# EAGLE board PCB (EAGLE 9.7.0)
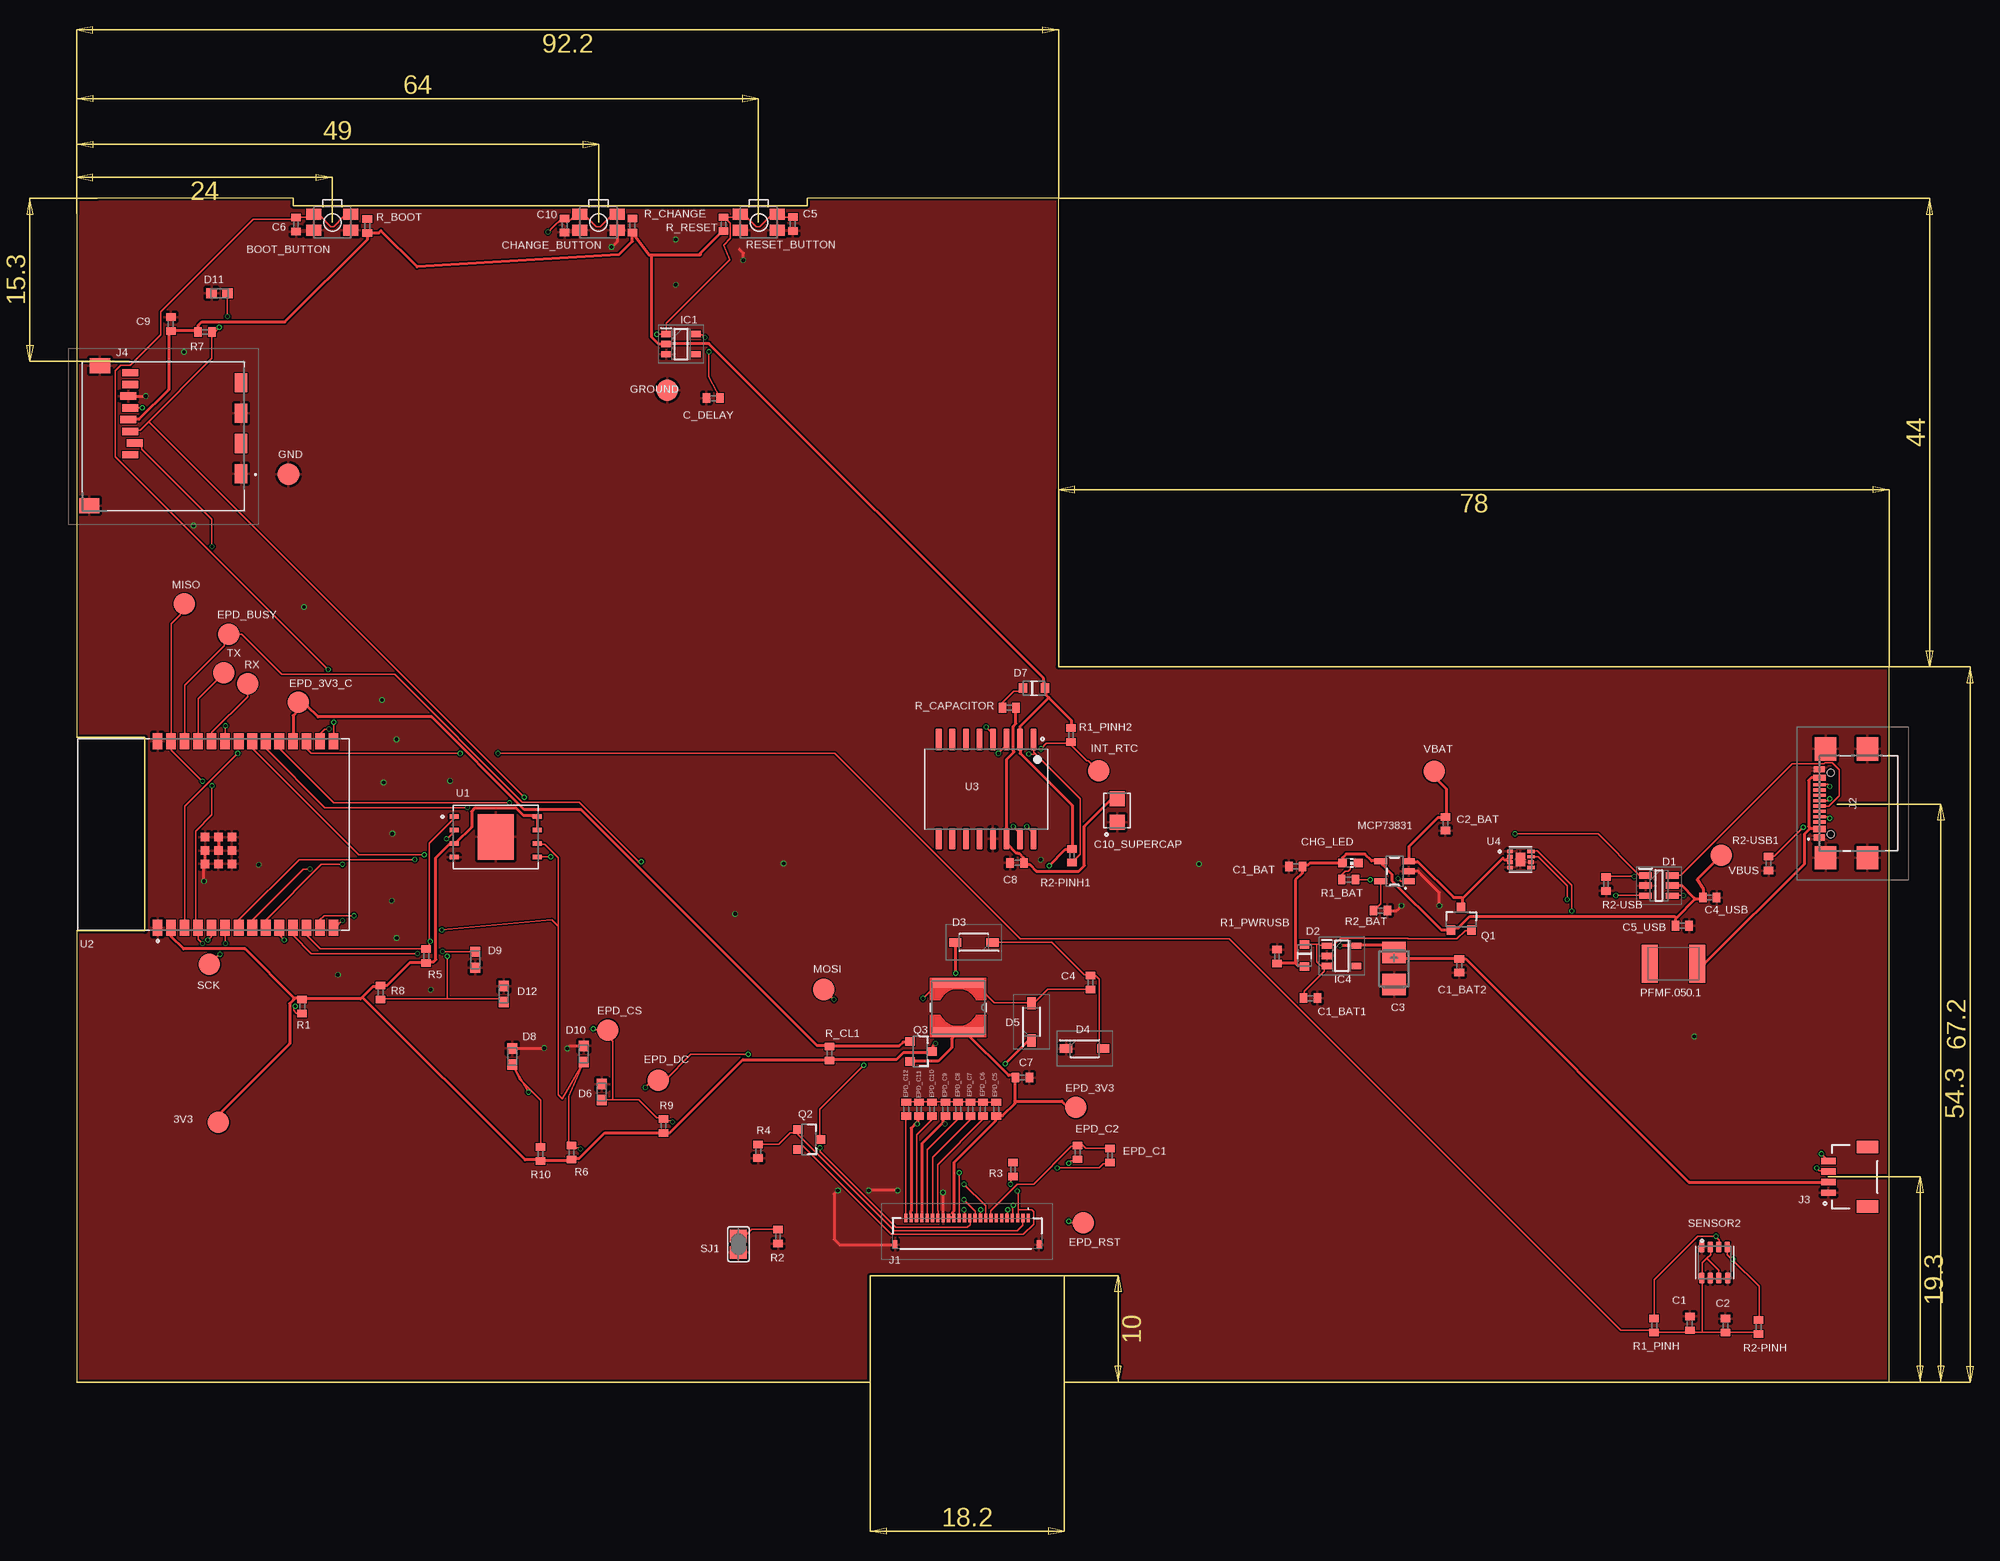
[diagram p0: board, top side]
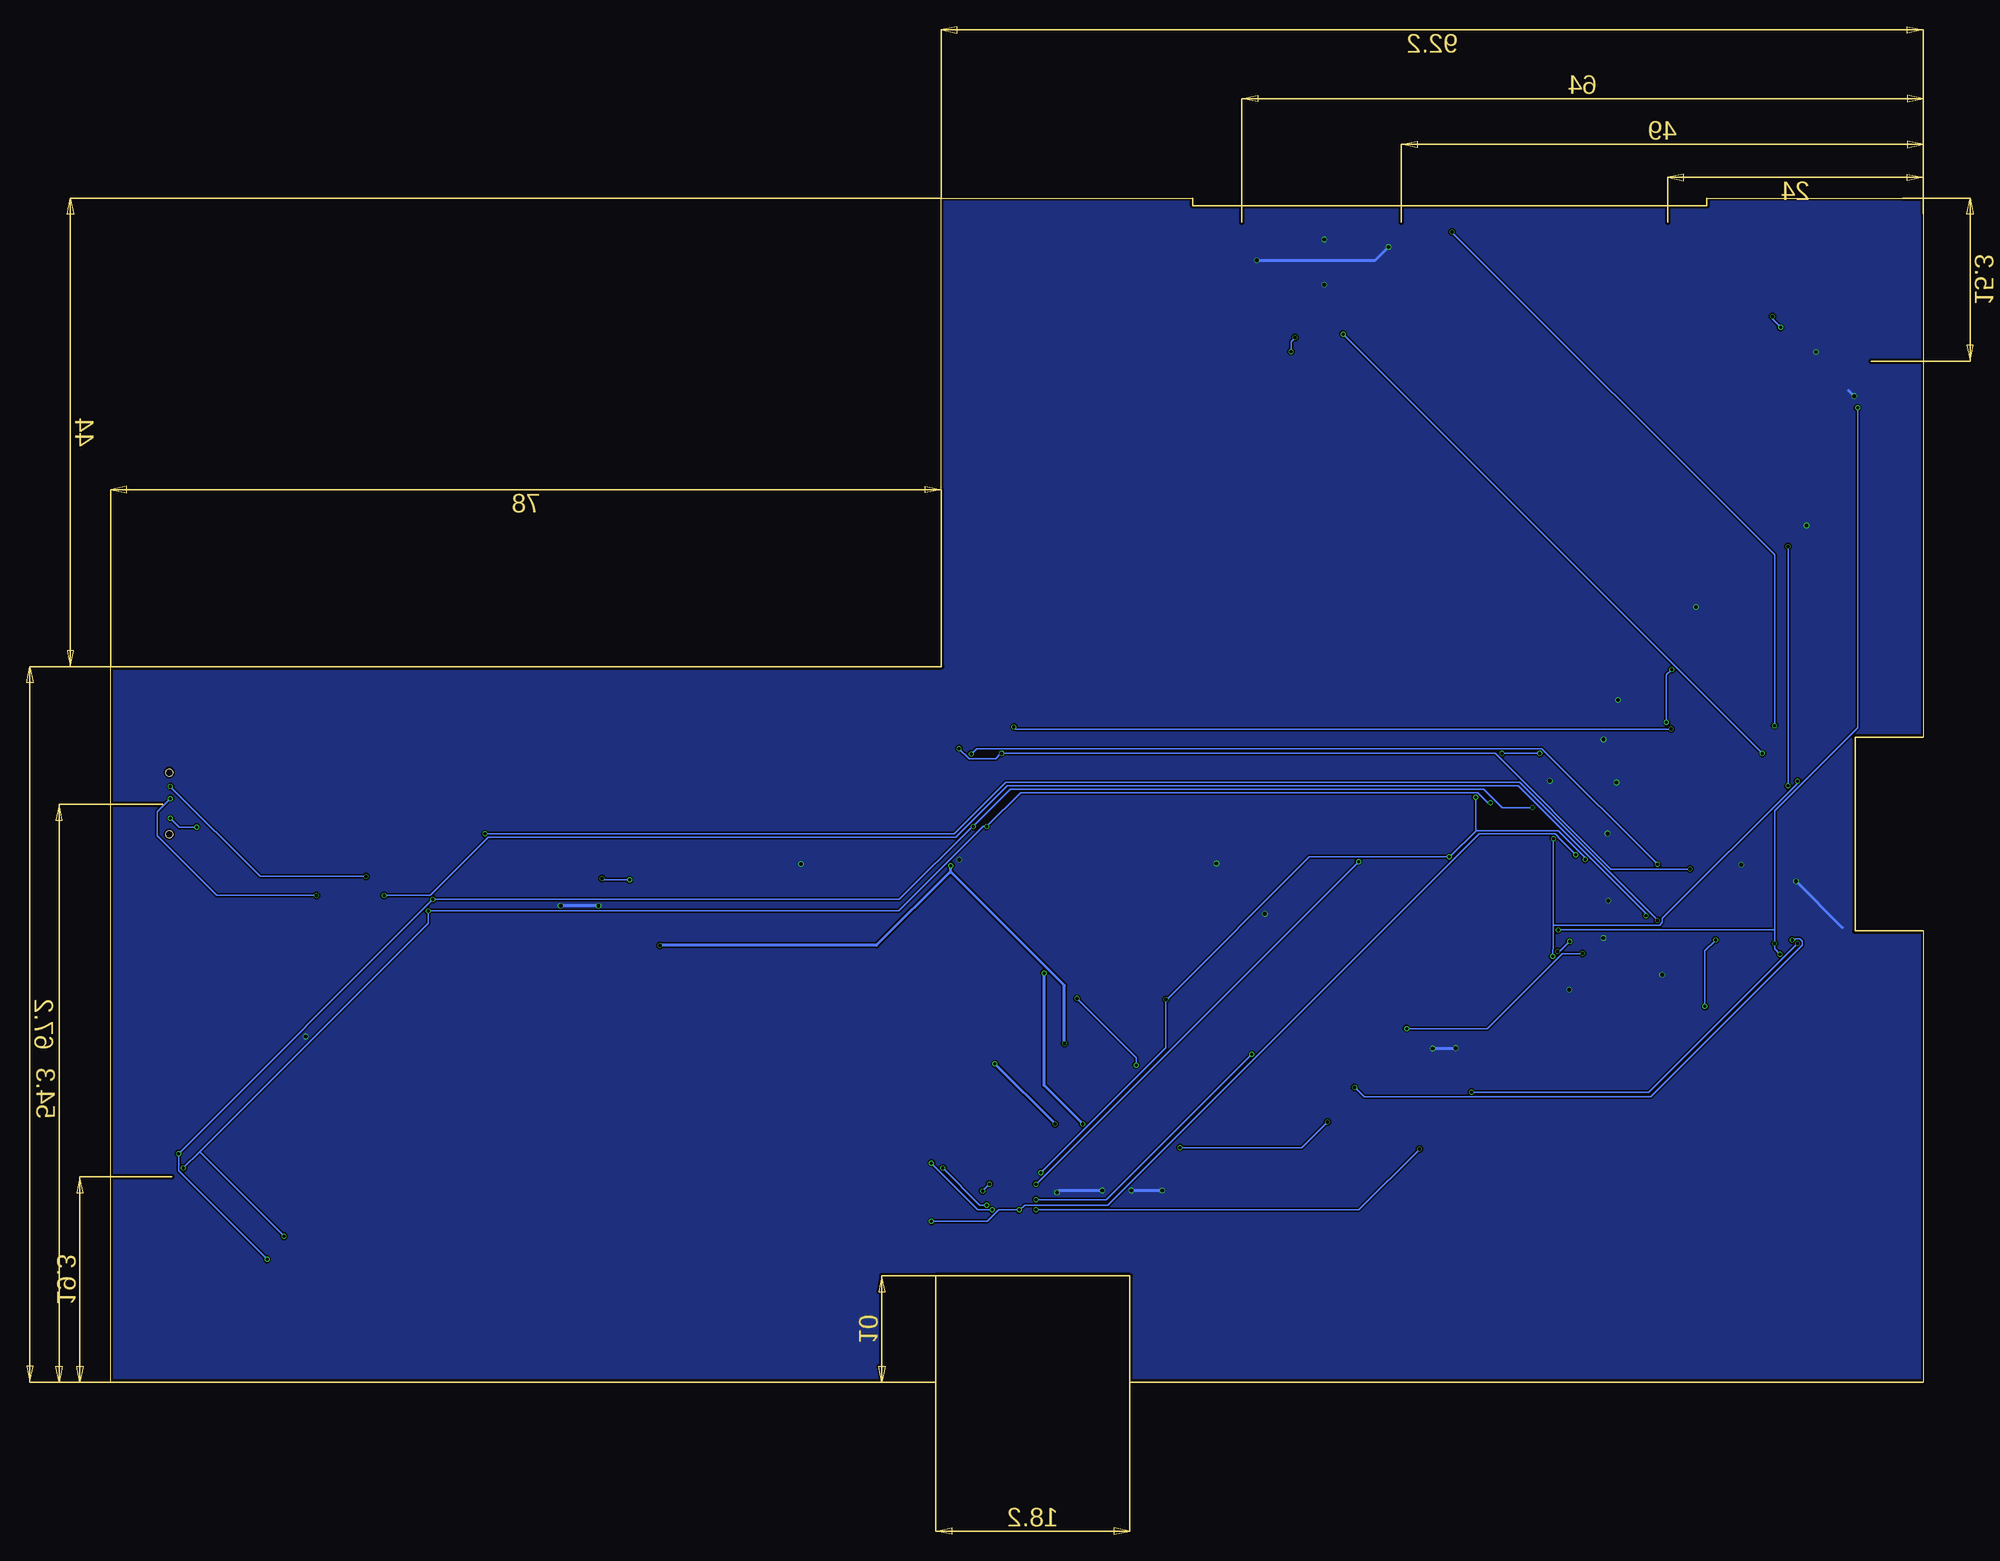
[diagram p1: board, bottom side, seen from below]

Size 170.2 x 111.2 mm. Coordinates in mm from the lower left corner, seen from the top.
Outline: 170.2,0 170.2,67.2 92.2,67.2 92.2,111.2 68.58,111.2 68.58,110.49 20.34,110.49 20.34,111.2 0,111.2 0,60.55 6.4,60.55 6.4,42.4 0,42.4 0,0 74.51,0 74.51,10 92.71,10 92.71,0 170.2,0
Copper layers (1*16): Top 0.035mm / dielectric 1.6mm / Bottom 0.035mm
Design rules "jlcpcb-2layers.dru *": minimum track width 5mil, minimum drill 0.3mm, track to track 5mil, track to pad 5mil, pad to pad 5mil, via to via 5mil, smd to smd 5mil, copper to edge 0.2mm, drill to drill 6mil, minimum pad ring 10mil, minimum via ring 3mil, stop-mask expansion 4mil, vias tented up to drill 0mil, thermal gap 10mil
Net classes: 1 Power: width 0.3 mm; 2 Signal: width 0.15 mm

## Footprints (pad centres in the part's own frame; a part is rotated, then mirrored left to right if it is on the bottom)
TP20R = smd 2 x 2: TP 0,0
MYBUTTON = smd 1.4 x 1.05: 1 1.75,0.75; 2 -1.75,0.75; 3 -1.75,-0.75; 4 1.75,-0.75
EAGLE-LTSPICE_C0402 = smd 0.7 x 0.9: 1 -0.65,0; 2 0.65,0
RCL_CT3528 = smd 2 x 2.2: + -1.5,0; - 1.5,0
CAPCP3225X100N = smd 1.4 x 1.4: 1 -1.1,0; 2 1.1,0
ADAFRUIT_CHIP-LED0603 = smd 0.8 x 0.8: A 0,-0.75; C 0,0.75
SOT95P280X145-6N = smd 1.2 x 0.6: 1 -1.25,0.95; 2 -1.25,0; 3 -1.25,-0.95; 4 1.25,-0.95; 5 1.25,0; 6 1.25,0.95
ESP32_WROVER_AVX---SD0805S020S1R0_AVX_SD0805S020S1R0_0 = smd 0.8 x 0.9: 1 -1.05,0; 2 1.05,0
SOD3716X135N = smd 1.15 x 0.8: 1 -1.75,0; 2 1.75,0
DIOC1608X36N = smd 0.97 x 0.94: 1 -0.75,0; 2 0.75,0
SOT95P280X125-5N = smd 0.9 x 0.6: 1 -1.4,0.95; 2 -1.4,0; 3 -1.4,-0.95; 4 1.4,-0.95; 5 1.4,0.95
SOT95P280X120-5N = smd 0.9 x 0.6: 1 -1.4,0.95; 2 -1.4,0; 3 -1.4,-0.95; 4 1.4,-0.95; 5 1.4,0.95
FH34SRJ24S05SH99 = smd 0.3 x 0.8: 1 5.75,1.45; 2 5.25,1.45; 3 4.75,1.45; 4 4.25,1.45; 5 3.75,1.45; 6 3.25,1.45; 7 2.75,1.45; 8 2.25,1.45; 9 1.75,1.45; 10 1.25,1.45; 11 0.75,1.45; 12 0.25,1.45; 13 -0.25,1.45; 14 -0.75,1.45; 15 -1.25,1.45; 16 -1.75,1.45; 17 -2.25,1.45; 18 -2.75,1.45; 19 -3.25,1.45; 20 -3.75,1.45; 21 -4.25,1.45; 22 -4.75,1.45; 23 -5.25,1.45; 24 -5.75,1.45 | smd 0.4 x 0.8: MP1 6.75,-1.05; MP2 -6.75,-1.05
SAMACSYS_PARTS_USB4110GFA = smd 0.3 x 1.023: A1 -3.35,3.678; B12 -3.05,3.678 | smd 0.3 x 1.15: A4 -2.55,3.678; A5 -1.25,3.678; A6 -0.25,3.678; A7 0.25,3.678; A8 1.25,3.678; A9 2.55,3.678; B4 2.25,3.678; B5 1.75,3.678; B6 0.75,3.678; B7 -0.75,3.678; B8 -1.75,3.678; B9 -2.25,3.678 | smd 0.3 x 1.048: A12 3.35,3.678; B1 3.05,3.678 | smd 2.18 x 2: MP1 -5.11,-0.827; MP2 5.11,-0.827; MP3 -5.11,3.103; MP4 5.11,3.103 | hole 0.65: -2.89,2.603; 2.89,2.603
JST04_1MM_RA = smd 0.6 x 1.35: 1 -1.5,0; 2 -0.5,0; 3 0.5,0; 4 1.5,0 | smd 1.2 x 2: NC1 2.8,-3.675; NC2 -2.8,-3.675
112ATAARR03ATTEND = smd 1.8 x 1.2: G1 10.6,10.4; G2 4.9,10.4; S1 7.75,10.4; S2 2.05,10.4 | smd 1.4 x 1.9: G3 13.6,-3.85; G4 0.45,-2.85 | smd 0.7 x 1.5: P1 8.8,0; P2 7.7,0.4; P3 6.6,0; P4 5.5,-0.2; P5 4.4,0; P6 3.3,-0.2; P7 2.2,0; P8 1.1,0
IND_4828-WE-TPC_WRE = smd 0.889 x 4.826: 1 -2.286,0; 2 2.286,0
ESP32_WROVER_SPARKFUN-IC-POWER_SOT23-5 = smd 0.55 x 1.2: 1 -0.95,-1.3; 2 0,-1.3; 3 0.95,-1.3; 4 0.95,1.3; 5 -0.95,1.3
ESP32C6_VARISTOR_CT/CN1812 = smd 1.5 x 3.6: 1 -2.25,0; 2 2.25,0
ESP32_WROVER_SPARKFUN-DISCRETESEMI_SOT23-3 = smd 0.8 x 0.9: 1 -0.95,-1; 2 0.95,-1; 3 0,1.1
ESP32_WROVER_EAGLE-LTSPICE_R0402 = smd 0.7 x 0.9: 1 -0.65,0; 2 0.65,0
ESP32_WROVER_BME680_PSON80P300X300X100-8N = smd 1.016 x 0.5: 1 1.458,1.2; 2 1.458,0.4; 3 1.458,-0.4; 4 1.458,-1.2; 5 -1.458,-1.22; 6 -1.458,-0.4; 7 -1.458,0.4; 8 -1.458,1.2
SJ = smd 1.168 x 1.6: 1 -0.762,0; 2 0.762,0
SON127P600X800X80-9N = smd 0.94 x 0.44: 1 -3.895,1.905; 2 -3.895,0.635; 3 -3.895,-0.635; 4 -3.895,-1.905; 5 3.895,-1.905; 6 3.895,-0.635; 7 3.895,0.635; 8 3.895,1.905 | smd 3.4 x 4.3: 9 0,0
XCVR_ESP32-C6-WROOM-1-N8 = smd 1.5 x 0.9: 1 -8.75,5.26; 2 -8.75,3.99; 3 -8.75,2.72; 4 -8.75,1.45; 5 -8.75,0.18; 6 -8.75,-1.09; 7 -8.75,-2.36; 8 -8.75,-3.63; 9 -8.75,-4.9; 10 -8.75,-6.17; 11 -8.75,-7.44; 12 -8.75,-8.71; 13 -8.75,-9.98; 14 -8.75,-11.25; 15 8.75,-11.25; 16 8.75,-9.98; 17 8.75,-8.71; 18 8.75,-7.44; 19 8.75,-6.17; 20 8.75,-4.9; 21 8.75,-3.63; 22 8.75,-2.36; 23 8.75,-1.09; 24 8.75,0.18; 25 8.75,1.45; 26 8.75,2.72; 27 8.75,3.99; 28 8.75,5.26 | smd 0.8 x 0.8: 29_1 -2.755,0.79; 29_2 -1.505,0.79; 29_3 -0.255,0.79; 29_4 -2.755,-0.46; 29_5 -1.505,-0.46; 29_6 -0.255,-0.46; 29_7 -2.755,-1.71; 29_8 -1.505,-1.71; 29_9 -0.255,-1.71
SOIC127P1032X265-16N = smd 2.05 x 0.59: 1 -4.655,4.445; 2 -4.655,3.175; 3 -4.655,1.905; 4 -4.655,0.635; 5 -4.655,-0.635; 6 -4.655,-1.905; 7 -4.655,-3.175; 8 -4.655,-4.445; 9 4.655,-4.445; 10 4.655,-3.175; 11 4.655,-1.905; 12 4.655,-0.635; 13 4.655,0.635; 14 4.655,1.905; 15 4.655,3.175; 16 4.655,4.445
SON50P200X200X80-9N = smd 0.6 x 0.35: 1 -0.985,0.75; 2 -0.985,0.25; 3 -0.985,-0.25; 4 -0.985,-0.75; 6 0.985,-0.25 | smd 0.76 x 0.27: 5 0.985,-0.75; 7 0.985,0.25; 8 0.985,0.75 | smd 0.9 x 1.3: 9 0,0

## Placement (x,y rotation side)
3V3  TPTP20R  [TP20R]  13.31,24.41 0 top
BOOT_BUTTON  BUTTON_CUSYOMV1  [MYBUTTON]  24,108.93 180 top
C1  100nF  [EAGLE-LTSPICE_C0402]  151.48,5.54 90 top
C1_BAT  4.7uF  [EAGLE-LTSPICE_C0402]  114.47,48.45 180 top
C1_BAT1  4.7uF  [EAGLE-LTSPICE_C0402]  115.85,36.07 0 top
C1_BAT2  4.7uF  [EAGLE-LTSPICE_C0402]  129.82,39.12 270 top
C2  100nF  [EAGLE-LTSPICE_C0402]  154.82,5.34 90 top
C2_BAT  4.7uF  [EAGLE-LTSPICE_C0402]  128.53,52.45 270 top
C3  100uF TANT  [RCL_CT3528]  123.71,38.85 270 top
C4  4.7uF/25V  [EAGLE-LTSPICE_C0402]  95.2,37.54 270 top
C4_USB  100nF  [EAGLE-LTSPICE_C0402]  153.35,45.52 0 top
C5  1uF  [EAGLE-LTSPICE_C0402]  67.25,108.78 270 top
C5_USB  4.7uF  [EAGLE-LTSPICE_C0402]  150.76,42.87 0 top
C6  100nF  [EAGLE-LTSPICE_C0402]  20.6,108.71 270 top
C7  10uF  [EAGLE-LTSPICE_C0402]  88.81,28.62 0 top
C8  100nF  [EAGLE-LTSPICE_C0402]  88.31,48.78 180 top
C9  100nF  [EAGLE-LTSPICE_C0402]  8.84,99.38 90 top
C10  100nF  [EAGLE-LTSPICE_C0402]  45.82,108.62 270 top
C10_SUPERCAP  CPH3225A  [CAPCP3225X100N]  97.69,53.7 90 top
C_DELAY  100nF  [EAGLE-LTSPICE_C0402]  59.77,92.42 180 top
CHANGE_BUTTON  BUTTON_CUSYOMV1  [MYBUTTON]  49,108.93 180 top
CHG_LED  [ADAFRUIT_CHIP-LED0603]  119.59,48.75 270 top
D1  USBLC6-2SC6Y  [SOT95P280X145-6N]  148.57,46.64 0 top
D2  ESP32_WROVER_AVX---SD0805S020S1R0_AVX_SD0805S020S1R0_0_0AVX_SD0805S020S1R0_0_0  [ESP32_WROVER_AVX---SD0805S020S1R0_AVX_SD0805S020S1R0_0]  115.29,40.08 270 top
D3  MBR0530  [SOD3716X135N]  84.24,41.32 180 top
D4  MBR0530  [SOD3716X135N]  94.65,31.34 0 top
D5  MBR0530  [SOD3716X135N]  89.67,33.84 90 top
D6  PGB1010603MR  [DIOC1608X36N]  49.31,27.25 270 top
D7  ESP32_WROVER_AVX---SD0805S020S1R0_AVX_SD0805S020S1R0_0_0AVX_SD0805S020S1R0_0_0  [ESP32_WROVER_AVX---SD0805S020S1R0_AVX_SD0805S020S1R0_0]  89.89,65.18 0 top
D8  PGB1010603MR  [DIOC1608X36N]  40.91,30.6 270 top
D9  PGB1010603MR  [DIOC1608X36N]  37.41,39.69 90 top
D10  PGB1010603MR  [DIOC1608X36N]  47.6,30.84 270 top
D11  PGB1010603MR  [DIOC1608X36N]  13.42,102.25 0.4 top
D12  PGB1010603MR  [DIOC1608X36N]  40.11,36.46 270 top
EPD_3V3  TPTP20R  [TP20R]  93.82,25.82 0 top
EPD_3V3_C  TPTP20R  [TP20R]  20.81,63.86 0 top
EPD_BUSY  TPTP20R  [TP20R]  14.27,70.24 0 top
EPD_C1  1uF/50V  [EAGLE-LTSPICE_C0402]  97.03,21.3 270 top
EPD_C2  1uF/50V  [EAGLE-LTSPICE_C0402]  93.99,21.59 270 top
EPD_C5  0.1uF/50V  [EAGLE-LTSPICE_C0402]  86.34,25.65 270 top
EPD_C6  1uF/50V  [EAGLE-LTSPICE_C0402]  85.09,25.65 270 top
EPD_C7  1uF/50V  [EAGLE-LTSPICE_C0402]  83.93,25.65 270 top
EPD_C8  1uF/50V  [EAGLE-LTSPICE_C0402]  82.77,25.65 270 top
EPD_C9  1uF/50V  [EAGLE-LTSPICE_C0402]  81.57,25.65 270 top
EPD_C10  1uF/50V  [EAGLE-LTSPICE_C0402]  80.31,25.65 270 top
EPD_C11  1uF/50V  [EAGLE-LTSPICE_C0402]  79.1,25.65 270 top
EPD_C12  1uF/50V  [EAGLE-LTSPICE_C0402]  77.89,25.65 270 top
EPD_CS  TPTP20R  [TP20R]  49.89,33.07 0 top
EPD_DC  TPTP20R  [TP20R]  54.61,28.36 0 top
EPD_RST  TPTP20R  [TP20R]  94.53,14.96 0 top
GND  TPTP20R  [TP20R]  19.89,85.26 0 top
GROUND  TPTP20R  [TP20R]  55.44,93.17 0 top
IC1  BD5229G-TR  [SOT95P280X125-5N]  56.74,97.49 0 top
IC4  XC6220A331MR-G  [SOT95P280X120-5N]  118.78,40.04 0 top
INT_RTC  TPTP20R  [TP20R]  95.96,57.41 0 top
J1  FH34SRJ-24S-0.5SH_99_  [FH34SRJ24S05SH99]  83.61,13.97 0 top
J2  SAMACSYS_PARTS_USB4110-GF-A  [SAMACSYS_PARTS_USB4110GFA]  167.32,54.37 90 top
J3  QWIIC_RIGHT_ANGLE  [JST04_1MM_RA]  164.48,19.3 90 top
J4  112A-TAAR-R03_ATTEND  [112ATAARR03ATTEND]  5.04,95.9 270 top
L1  744043680IND_4828-WE-TPC_WRE  [IND_4828-WE-TPC_WRE]  82.77,35.2 270 top
MCP73831  ESP32_WROVER_SPARKFUN-IC-POWER_MCP73831  [ESP32_WROVER_SPARKFUN-IC-POWER_SOT23-5]  123.76,47.99 90 top
MISO  TPTP20R  [TP20R]  10.11,73.09 0 top
MOSI  TPTP20R  [TP20R]  70.14,36.88 0 top
PFMF.050.1  ESP32C6_VARISTORCN1812  [ESP32C6_VARISTOR_CT/CN1812]  149.94,39.3 180 top
Q1  20V/4.2A/52mΩ/1.4W  [ESP32_WROVER_SPARKFUN-DISCRETESEMI_SOT23-3]  130.01,43.46 0 top
Q2  SI1308EDL-T1-GE3  [ESP32_WROVER_SPARKFUN-DISCRETESEMI_SOT23-3]  68.73,22.8 270 top
Q3  20V/4.2A/52mΩ/1.4W  [ESP32_WROVER_SPARKFUN-DISCRETESEMI_SOT23-3]  79.23,31.06 270 top
R1  10k  [ESP32_WROVER_EAGLE-LTSPICE_R0402]  21.18,35.3 90 top
R1_BAT  200  [ESP32_WROVER_EAGLE-LTSPICE_R0402]  119.44,47.2 0 top
R1_PINH  10k  [ESP32_WROVER_EAGLE-LTSPICE_R0402]  148.13,5.34 270 top
R1_PINH2  10k  [ESP32_WROVER_EAGLE-LTSPICE_R0402]  93.36,60.79 90 top
R1_PWRUSB  100k  [ESP32_WROVER_EAGLE-LTSPICE_R0402]  112.72,39.99 270 top
R2  2.2  [ESP32_WROVER_EAGLE-LTSPICE_R0402]  65.86,13.68 90 top
R2-PINH  10k  [ESP32_WROVER_EAGLE-LTSPICE_R0402]  157.94,5.19 270 top
R2-PINH1  10k  [ESP32_WROVER_EAGLE-LTSPICE_R0402]  93.47,49.44 90 top
R2-USB  5k1  [ESP32_WROVER_EAGLE-LTSPICE_R0402]  143.61,46.8 270 top
R2-USB1  5k1  [ESP32_WROVER_EAGLE-LTSPICE_R0402]  158.87,48.7 90 top
R2_BAT  2k  [ESP32_WROVER_EAGLE-LTSPICE_R0402]  122.44,44.28 180 top
R3  0.47  [ESP32_WROVER_EAGLE-LTSPICE_R0402]  87.92,19.99 90 top
R4  10k  [ESP32_WROVER_EAGLE-LTSPICE_R0402]  63.99,21.7 270 top
R5  10k  [ESP32_WROVER_EAGLE-LTSPICE_R0402]  32.82,40.02 270 top
R6  10k  [ESP32_WROVER_EAGLE-LTSPICE_R0402]  46.47,21.57 270 top
R7  10k  [ESP32_WROVER_EAGLE-LTSPICE_R0402]  12.04,98.61 180 top
R8  10k  [ESP32_WROVER_EAGLE-LTSPICE_R0402]  28.54,36.6 90 top
R9  10k  [ESP32_WROVER_EAGLE-LTSPICE_R0402]  55.1,24.08 270 top
R10  10k  [ESP32_WROVER_EAGLE-LTSPICE_R0402]  43.55,21.43 270 top
R_BOOT  10k  [ESP32_WROVER_EAGLE-LTSPICE_R0402]  27.29,108.58 270 top
R_CAPACITOR  15  [ESP32_WROVER_EAGLE-LTSPICE_R0402]  87.57,63.34 0 top
R_CHANGE  10k  [ESP32_WROVER_EAGLE-LTSPICE_R0402]  52.18,108.61 270 top
R_CL1  10k  [ESP32_WROVER_EAGLE-LTSPICE_R0402]  70.7,30.89 270 top
R_RESET  10k  [ESP32_WROVER_EAGLE-LTSPICE_R0402]  60.74,108.75 270 top
RESET_BUTTON  BUTTON_CUSYOMV1  [MYBUTTON]  64.05,108.93 180 top
RX  TPTP20R  [TP20R]  16.05,65.61 0 top
SCK  TPTP20R  [TP20R]  12.45,39.24 0 top
SENSOR2  ESP32_WROVER_BME680_BME680  [ESP32_WROVER_BME680_PSON80P300X300X100-8N]  153.81,11.24 90 top
SJ1  [SJ]  62.14,12.97 90 top
TX  TPTP20R  [TP20R]  13.83,66.61 0 top
U1  W25Q512JVEIQ  [SON127P600X800X80-9N]  39.34,51.21 0 top
U2  ESP32-C6-WROOM-1-N8  [XCVR_ESP32-C6-WROOM-1-N8]  12.86,51.44 90 top
U3  DS3231SN#  [SOIC127P1032X265-16N]  85.4,55.7 270 top
U4  MAX17048G+T10  [SON50P200X200X80-9N]  135.56,49.09 0 top
VBAT  TPTP20R  [TP20R]  127.47,57.36 0 top
VBUS  TPTP20R  [TP20R]  154.43,49.47 0 top

## Library data of the parts
3V3 BOOT_BUTTON CHANGE_BUTTON CHG_LED EPD_3V3 EPD_3V3_C EPD_BUSY EPD_CS EPD_DC EPD_RST GND GROUND INT_RTC MISO MOSI PFMF.050.1 RESET_BUTTON RX SCK SJ1 TX VBAT VBUS = DeskAssistant v19 v1
C1 C1_BAT C1_BAT1 C1_BAT2 C2 C2_BAT C4 C4_USB C5 C5_USB C6-C10 C_DELAY EPD_C1 EPD_C2 EPD_C5-EPD_C12 = DeskAssistant v19 v1; SPICEMODEL: NONE; SPICEPREFIX: C
C3 = DeskAssistant v19 v1; SPICEPREFIX: C
C10_SUPERCAP = DeskAssistant v19 v1; AVAILABILITY: Not in stock; CHECK_PRICES: https://www.snapeda.com/parts/CPH3225A/Seiko+Instruments/view-part/?ref=eda; DESCRIPTION: 11 mF (EDLC) Supercapacitor 3.3 V 1210 (3225 Metric) - -; MF: Seiko Instruments; MP: CPH3225A; PACKAGE: 1210 Seiko; PRICE: None; PURCHASE-URL: https://www.snapeda.com/api/url_track_click_mouser/?unipart_id=562593&manufacturer=Seiko Instruments&part_name=CPH3225A&search_term=None; SNAPEDA_LINK: https://www.snapeda.com/parts/CPH3225A/Seiko+Instruments/view-part/?ref=snap
D1 = DeskAssistant v19 v1; AVAILABILITY: In Stock; CHECK_PRICES: https://www.snapeda.com/parts/USBLC6-2SC6Y/STMicroelectronics/view-part/?ref=eda; DESCRIPTION: 17V Clamp 5A (8/20µs) Ipp Tvs Diode Surface Mount SOT-23-6; MF: STMicroelectronics; MP: USBLC6-2SC6Y; PACKAGE: SOT-23-6 STMicroelectronics; PRICE: None; SNAPEDA_LINK: https://www.snapeda.com/parts/USBLC6-2SC6Y/STMicroelectronics/view-part/?ref=snap
D2 D7 = DeskAssistant v19 v1; CENTROID_NOT_SPECIFIED: No; DATASHEET: http://datasheets.avx.com/schottky.pdf; DIGIKEY_DESCRIPTION: DIODE SCHOTTKY 20V 1A 0805; DIGIKEY_PART_NUMBER: 478-7800-1-ND; LEAD_FREE: yes; MF: AVX; MOUSER_PART_NUMBER: 581-SD0805S020S1R0; PACKAGE: 0805 (2012 metric); PREFIX: D; ROHS: yes; TEMPERATURE_RANGE_HIGH: +125°C; TEMPERATURE_RANGE_LOW: -55°C
D3-D5 = DeskAssistant v19 v1; AVAILABILITY: In Stock; CHECK_PRICES: https://www.snapeda.com/parts/MBR0530/Onsemi/view-part/?ref=eda; DESCRIPTION: Diode Schottky 30 V 500mA Surface Mount SOD-123; MF: ON Semiconductor; MP: MBR0530; PACKAGE: SOD-123-2 ON Semiconductor; PRICE: None; PURCHASE-URL: https://www.snapeda.com/api/url_track_click_mouser/?unipart_id=179458&manufacturer=ON Semiconductor&part_name=MBR0530&search_term=None; SNAPEDA_LINK: https://www.snapeda.com/parts/MBR0530/Onsemi/view-part/?ref=snap
D6 D8-D12 = DeskAssistant v19 v1; AVAILABILITY: In Stock; CHECK_PRICES: https://www.snapeda.com/parts/PGB1010603MR/Littelfuse/view-part/?ref=eda; DESCRIPTION: 150V (Typ) Clamp - Ipp Tvs Diode Surface Mount 0603 (1608 Metric); MF: Littelfuse Inc.; MP: PGB1010603MR; PACKAGE: 0603 Littelfuse Inc.; PRICE: None; PURCHASE-URL: https://www.snapeda.com/api/url_track_click_mouser/?unipart_id=5659453&manufacturer=Littelfuse Inc.&part_name=PGB1010603MR&search_term=None; SNAPEDA_LINK: https://www.snapeda.com/parts/PGB1010603MR/Littelfuse/view-part/?ref=snap
IC1 = DeskAssistant v19 v1; DESCRIPTION: Voltage Detector with Adjustable Delay Time: CMOS processes are utilized to develop high precision, low current consumption CMOS reset ICs that allow arbitrary setting of the delay time. The extensive lineup includes both Nch Open Drain and CMOS output types in a wide range of detection voltages (from 2.3V to 6.0V, in 0.1V steps), enabling selection of the ideal solution based on customer requirements. In addition, the entire series is of course both lead-free and RoHS-compliant.; HEIGHT: 1.25mm; MANUFACTURER_NAME: ROHM Semiconductor; MANUFACTURER_PART_NUMBER: BD5229G-TR; MOUSER_PART_NUMBER: 755-BD5229G-TR; MOUSER_PRICE-STOCK: https://www.mouser.co.uk/ProductDetail/ROHM-Semiconductor/BD5229G-TR?qs=4kLU8WoGk0vvnhrrYwdszw%3D%3D
IC4 = DeskAssistant v19 v1; DESCRIPTION: LDO Voltage Regulators; HEIGHT: 1.2mm; MANUFACTURER_NAME: Torex; MANUFACTURER_PART_NUMBER: XC6220A331MR-G; MOUSER_PART_NUMBER: 865-XC6220A331MR-G; MOUSER_PRICE-STOCK: https://www.mouser.co.uk/ProductDetail/Torex-Semiconductor/XC6220A331MR-G?qs=AsjdqWjXhJ8ZSWznL1J0gg%3D%3D
J1 = DeskAssistant v19 v1; DESCRIPTION: 24 Position FFC, FPC Connector Contacts, Top and Bottom 0.020" (0.50mm) Surface Mount, Right Angle; HEIGHT: 1.1mm; MANUFACTURER_NAME: Hirose; MANUFACTURER_PART_NUMBER: FH34SRJ-24S-0.5SH(99); MOUSER_PART_NUMBER: 798-FH34SRJ24S05SH99; MOUSER_PRICE-STOCK: https://www.mouser.co.uk/ProductDetail/Hirose-Connector/FH34SRJ-24S-0.5SH99?qs=vcbW%252B4%252BSTIpKBl5ap9J8Fw%3D%3D
J2 = DeskAssistant v19 v1; DESCRIPTION: CONN USB 2.0 TYPE-C R/A SMT; HEIGHT: 3.26mm; MANUFACTURER_NAME: GCT (GLOBAL CONNECTOR TECHNOLOGY); MANUFACTURER_PART_NUMBER: USB4110-GF-A; MOUSER_PART_NUMBER: 640-USB4110-GF-A; MOUSER_PRICE-STOCK: https://www.mouser.co.uk/ProductDetail/GCT/USB4110-GF-A?qs=KUoIvG%2F9IlYiZvIXQjyJeA%3D%3D
J3 = DeskAssistant v19 v1; PROD_ID: CONN-13694
J4 = DeskAssistant v19 v1; DESCRIPTION: Micro SD Card Socket, Push-Push Type, Top Mount, SMT, H=1.83mm, 10u; HEIGHT: 1.9mm; MANUFACTURER_NAME: ATTEND; MANUFACTURER_PART_NUMBER: 112A-TAAR-R03 ATTEND
L1 = DeskAssistant v19 v1; COPYRIGHT: Copyright (C) 2024 Ultra Librarian. All rights reserved.; MANUFACTURER_PART_NUMBER: 744043680; MFR_NAME: Wurth Electronics
MCP73831 = DeskAssistant v19 v1; PROD_ID: IC-09995
Q1 Q3 = DeskAssistant v19 v1; PROD_ID: TRAN-14388
Q2 = DeskAssistant v19 v1; AVAILABILITY: In Stock; CHECK_PRICES: https://www.snapeda.com/parts/SI1308EDL-T1-GE3/Vishay+Siliconix/view-part/?ref=eda; DESCRIPTION: Si1308EDL-T1-GE3 N-channel MOSFET Transistor, 1.5 A, 30 V, 3-Pin SC-70 | Siliconix / Vishay SI1308EDL-T1-GE3; MF: Vishay Siliconix; MP: SI1308EDL-T1-GE3; PACKAGE: SOT-323 Vishay Semiconductor; PRICE: None; PURCHASE-URL: https://www.snapeda.com/api/url_track_click_mouser/?unipart_id=274603&manufacturer=Vishay Siliconix&part_name=SI1308EDL-T1-GE3&search_term=None; SNAPEDA_LINK: https://www.snapeda.com/parts/SI1308EDL-T1-GE3/Vishay+Siliconix/view-part/?ref=snap
R1 R1_BAT R1_PINH R1_PINH2 R1_PWRUSB R2 R2-PINH R2-PINH1 R2-USB R2-USB1 R2_BAT R3-R10 R_BOOT R_CAPACITOR R_CHANGE R_CL1 R_RESET = DeskAssistant v19 v1; SPICEMODEL: NONE; SPICEPREFIX: R
SENSOR2 = DeskAssistant v19 v1; AVAILABILITY: Unavailable; DESCRIPTION: Integrated Environmental Unit; MF: Bosch Sensortec; MP: BME680; PACKAGE: LGA-8 Bosch Tools; PRICE: None
U1 = DeskAssistant v19 v1; AVAILABILITY: In Stock; CHECK_PRICES: https://www.snapeda.com/parts/W25Q512JVEIQ/Winbond+Electronics/view-part/?ref=eda; DESCRIPTION: FLASH - NOR Memory IC 512Mb (64M x 8) SPI - Quad I/O 133 MHz 8-WSON (8x6); MF: Winbond Electronics; MP: W25Q512JVEIQ; PACKAGE: Package; PRICE: None; SNAPEDA_LINK: https://www.snapeda.com/parts/W25Q512JVEIQ/Winbond+Electronics/view-part/?ref=snap
U2 = DeskAssistant v19 v1; AVAILABILITY: In Stock; CHECK_PRICES: https://www.snapeda.com/parts/ESP32-C6-WROOM-1-N8/Espressif+Systems/view-part/?ref=eda; DESCRIPTION: Multiprotocol Modules ESP32-C6 module, Wi-Fi 6 in 2.4 GHz band, Bluetooth 5, Zigbee 3.0 and Thread. ESP34-WROOM Compatible - ENGINEERING SAMPLE; MF: Espressif Systems; MP: ESP32-C6-WROOM-1-N8; PACKAGE: None; PRICE: None; SNAPEDA_LINK: https://www.snapeda.com/parts/ESP32-C6-WROOM-1-N8/Espressif+Systems/view-part/?ref=snap
U3 = DeskAssistant v19 v1; AVAILABILITY: In Stock; CHECK_PRICES: https://www.snapeda.com/parts/DS3231SN%23/Analog+Devices/view-part/?ref=eda; DESCRIPTION: Extremely Accurate I²C-Integrated RTC/TCXO/Crystal; MF: Analog Devices; MP: DS3231SN#; PACKAGE: SOIC-16 Maxim; PRICE: None; PURCHASE-URL: https://www.snapeda.com/api/url_track_click_mouser/?unipart_id=99048&manufacturer=Analog Devices&part_name=DS3231SN#&search_term=None; SNAPEDA_LINK: https://www.snapeda.com/parts/DS3231SN%23/Analog+Devices/view-part/?ref=snap
U4 = DeskAssistant v19 v1; AVAILABILITY: In Stock; CHECK_PRICES: https://www.snapeda.com/parts/MAX17048G+T10/Analog+Devices/view-part/?ref=eda; DESCRIPTION: 3µA 1-Cell/2-Cell Fuel Gauge with ModelGauge; MF: Analog Devices; MP: MAX17048G+T10; PACKAGE: TDFN-8 Maxim; PRICE: None; PURCHASE-URL: https://www.snapeda.com/api/url_track_click_mouser/?unipart_id=329239&manufacturer=Analog Devices&part_name=MAX17048G+T10&search_term=None; SNAPEDA_LINK: https://www.snapeda.com/parts/MAX17048G+T10/Analog+Devices/view-part/?ref=snap

## Nets
3V3 [Power]: 3V3.TP C1_BAT2.1 C3.+ C9.1 D7.2 IC1.2 IC4.5 J3.2 J4.P4 Q3.3 R1.2 R1_PINH2.2 R2-PINH1.2 R5.2 R6.2 R7.2 R8.2 R9.2 R10.2 R_BOOT.2 R_CHANGE.2 R_CL1.2 R_RESET.2 U1.3 U1.7 U1.8 U2.2 U3.2
32KHZ [Signal]: R2-PINH1.1 U2.9 U3.1
DN [Signal]: D1.4 J2.A7 J2.B6
DP [Signal]: D1.6 J2.A6 J2.B7
EPD_3V3 [Power]: C7.1 EPD_3V3.TP EPD_C5.2 J1.15 J1.16 L1.2 Q3.2
EPD_3V3_C [Power]: EPD_3V3_C.TP Q3.1 R_CL1.1 U2.18
EPD_BUSY [Signal]: EPD_BUSY.TP J1.9 U2.26
EPD_CS [Signal]: D6.2 EPD_CS.TP J1.12 R9.1 U2.11
EPD_DC [Signal]: EPD_DC.TP J1.11 U2.5
EPD_RST [Signal]: EPD_RST.TP J1.10 U2.21
FLASH_CS [Signal]: D9.2 R5.1 U1.1 U2.12
GDR [Signal]: J1.2 Q2.1 R4.1
GND [Power]: BOOT_BUTTON.1 BOOT_BUTTON.2 C1.2 C1_BAT1.2 C1_BAT2.2 C1_BAT.2 C2.2 C2_BAT.2 C3.- C4_USB.2 C5.2 C5_USB.2 C6.2 C7.2 C8.2 C9.2 C10.2 C10_SUPERCAP.1 C_DELAY.2 CHANGE_BUTTON.1 CHANGE_BUTTON.2 D1.2 D4.1 D6.1 D8.1 D9.1 D10.1 D11.1 D12.1 GND.TP GROUND.TP IC1.3 IC4.2 J1.17 J1.MP1 J1.MP2 J2.A1 J2.A12 J2.B1 J2.B12 J2.MP1 J2.MP2 J2.MP3 J2.MP4 J3.1 J4.G1 J4.G2 J4.G3 J4.G4 J4.P6 MCP73831.2 R1_PWRUSB.1 R2-USB1.1 R2-USB.2 R2.1 R2_BAT.1 R4.2 RESET_BUTTON.1 RESET_BUTTON.2 SENSOR2.1 SENSOR2.5 SENSOR2.7 SJ1.1 U1.4 U1.9 U2.1 U2.28 U2.29_1 U2.29_2 U2.29_3 U2.29_4 U2.29_5 U2.29_6 U2.29_7 U2.29_8 U2.29_9 U3.13 U4.1 U4.4 U4.6 U4.9
GPIO8 [Signal]: R1.1 U2.10
I2C_PW [Signal]: C1.1 C2.1 R1_PINH.2 R2-PINH.2 SENSOR2.2 SENSOR2.6 SENSOR2.8 U2.17
INT_RTC [Signal]: INT_RTC.TP R1_PINH2.1 U2.8 U3.3
IO/BOOT [Signal]: BOOT_BUTTON.3 BOOT_BUTTON.4 C6.1 U2.15
IO/CHANGE [Signal]: C10.1 CHANGE_BUTTON.3 CHANGE_BUTTON.4 U2.23
MISO [Signal]: D12.2 MISO.TP R8.1 U1.2 U2.27
MOSI [Signal]: D11.2 J1.14 J4.P3 MOSI.TP R7.1 U1.5 U2.7
N$1 [Signal]: PFMF.050.1.2
N$2 [Signal]: J2.A5 R2-USB1.2
N$3 [Signal]: J2.B5 R2-USB.1
N$4 [Signal]: C1_BAT1.1 D2.1 IC4.1 IC4.3 Q1.2
N$6 [Signal]: EPD_C2.2 J1.5
N$7 [Signal]: EPD_C5.1 EPD_C6.1 EPD_C7.1 EPD_C8.1 EPD_C9.1 EPD_C10.1 EPD_C11.1 EPD_C12.1
N$8 [Signal]: C_DELAY.1 IC1.5
N$9 [Signal]: C4.1 D3.1 D4.2
N$10 [Signal]: R3.2
N$11 [Signal]: CHG_LED.C R1_BAT.1
N$12 [Signal]: MCP73831.1 R1_BAT.2
N$13 [Signal]: EPD_C12.2 J1.24
N$14 [Signal]: MCP73831.5 R2_BAT.2
N$15 [Signal]: D7.1 R_CAPACITOR.1
N$16 [Signal]: EPD_C10.2 J1.22
N$18 [Signal]: EPD_C8.2 J1.20
N$19 [Signal]: EPD_C7.2 J1.19
N$20 [Signal]: EPD_C6.2 J1.18
N$31 [Signal]: EPD_C1.1 EPD_C2.1 J1.8
N$32 [Signal]: EPD_C1.2 J1.4
PREVGH [Power]: D5.1 EPD_C9.2 J1.21
PREVGL [Power]: D3.2 EPD_C11.2 J1.23
RESE [Signal]: J1.3 Q2.2 R3.1
RESE' [Signal]: R2.2 SJ1.2
RESET [Signal]: C5.1 IC1.1 R_RESET.1 RESET_BUTTON.3 RESET_BUTTON.4 U2.3
RESET1 [Signal]: R_CHANGE.1
RESET2 [Signal]: R_BOOT.1
RTC_RST [Signal]: U2.16 U3.4
RX [Signal]: RX.TP U2.24
SCK [Signal]: D10.2 J1.13 J4.P5 R6.1 SCK.TP U1.6 U2.6
SCL [Signal]: J3.4 R2-PINH.1 SENSOR2.4 U2.20 U3.16 U4.7
SDA [Signal]: J3.3 R1_PINH.1 SENSOR2.3 U2.19 U3.15 U4.8
SRC [Signal]: C4.2 D5.2 L1.1 Q2.3
SS_SD [Signal]: D8.2 J4.P2 R10.1 U2.4
TX [Signal]: TX.TP U2.25
USB_D+ [Signal]: D1.1 U2.14
USB_D- [Signal]: D1.3 U2.13
VBAT [Power]: C2_BAT.1 MCP73831.3 Q1.3 U4.2 U4.3 VBAT.TP
VBUS [Power]: C1_BAT.1 C4_USB.1 C5_USB.1 CHG_LED.A D1.5 D2.2 MCP73831.4 Q1.1 R1_PWRUSB.2 VBUS.TP
VRTC [Power]: C8.1 C10_SUPERCAP.2 R_CAPACITOR.2 U3.14
VUSB [Power]: J2.A4 J2.A9 J2.B4 J2.B9 PFMF.050.1.1

## Tracks (layer width: path | path; a pad name or v marks a point on that pad's centre or on a via)
3V3  (via drill 0.3)
  Top 0.3: 53.98,105.86 58.54,105.86 58.54,106 60.64,108.1 R_RESET.2 | 53.98,105.86 53.75,105.86 R_CHANGE.2 52.18,107.14 50.92,105.88 31.97,104.74 28.57,108.14 28.37,107.94 R_BOOT.2 27.29,107.3 19.56,99.57 11.75,99.57 11.43,99.25 11.43,98.74 R7.2 11.37,98.61 11.24,98.74 8.89,98.74 C9.1 8.76,98.61 8.64,98.49 8.64,93.22 5.84,90.42 4.89,90.42 J4.P4 | 53.98,105.86 53.98,98.17 54.61,97.54 55.31,97.54 IC1.2 55.44,97.54 59.37,97.54 90.81,66.1 90.81,65.22 D7.2 91,65.15 91,64.58 91.28,64.29 | J3.2 164.47,18.8 151.38,18.8 130.43,39.75 129.92,39.75 C1_BAT2.1 129.79,39.81 124.27,39.81 123.83,40.26 C3.+ 123.7,40.39 123.06,41.02 120.21,41.02 IC4.5 120.08,41.02 v118.62,41.02 | U1.7 43.24,51.88 43.24,52.96 U1.8 43.18,53.09 42.86,53.09 42.74,53.21 41.97,53.21 41.27,53.91 37.4,53.91 37.08,53.59 37.08,52.13 35.56,50.61 35.5,50.61 U1.3 35.31,50.55 34.99,50.55 33.72,49.28 33.72,39.69 33.53,39.5 32.89,39.5 R5.2 32.77,39.43 31.3,39.43 29.15,37.27 28.64,37.27 R8.2 28.51,37.21 28.45,37.15 27.81,37.15 26.83,36.16 | 26.83,36.16 26.67,36.01 21.21,36.01 R1.2 21.08,36.07 20.45,36.07 | 20.45,36.07 15.81,40.7 10.03,40.7 8.89,41.85 8.89,42.67 U2.2 | 3V3.TP 13.34,24.45 13.34,25.15 20,31.81 20,35.56 20.38,35.94 20.45,36.07 | 91.28,64.29 93.41,62.17 93.41,61.47 R1_PINH2.2 | 91.28,64.29 88.58,61.59 88.58,60.45 U3.2 88.58,60.33 88.58,59.05 93.47,54.17 93.47,50.1 R2-PINH1.2 93.34,50.04 92.84,50.04 v91.31,48.51 | v80.64,31.81 80.45,31.62 80.45,31.11 Q3.3 80.2,30.92 77.6,30.92 76.96,30.29 70.74,30.29 R_CL1.2 70.55,30.29 62.55,30.29 55.69,23.43 55.24,23.43 R9.2 55.05,23.43 49.59,23.43 47.18,21.02 46.55,21.02 R6.2 46.42,20.89 46.35,20.83 43.56,20.83 R10.2 43.43,20.89 42.1,20.89 26.83,36.16
  Bottom 0.3: 91.31,47.94 v91.31,48.51 | 91.31,47.94 80.64,37.27 v80.64,31.81 | v118.62,41.02 98.3,41.02 91.44,47.88 91.31,47.94
32KHZ  (via drill 0.3)
  Top 0.15: 89.95,59.09 89.85,59.18 89.85,60.33 U3.1 | 89.95,59.09 94.23,54.8 94.23,49.59 93.47,48.83 R2-PINH1.1 | v24.96,48.64 22.99,48.64 17.78,43.43 17.78,42.74 U2.9 | v89.41,58.99 89.85,58.99 89.95,59.09
  Bottom 0.15: v24.96,48.64 35.81,59.5 88.9,59.5 v89.41,58.99
DN  (via drill 0.3)
  Top 0.15: J2.B6 163.65,55.06 163.65,54.67 J2.A7 163.71,54.61 164.41,54.61 v164.6,54.8 | v150.88,45.72 149.86,45.72 D1.4
  Bottom 0.15: v150.88,45.72 160.24,45.72 165.82,51.3 165.82,53.59 v164.6,54.8
DP
  Top 0.15: J2.B7 163.65,53.66 163.65,54.1 J2.A6 163.71,54.1 164.54,54.1 165.49,55.06 165.49,57.53 164.86,58.17 164.16,58.17 164.09,58.1 161.1,58.1 150.62,47.62 149.86,47.62 D1.6
EPD_3V3
  Top 0.3: Q3.2 78.23,30.16 80.9,30.16 82.17,31.43 82.17,32.26 82.8,32.89 L1.2 82.93,32.83 83.5,32.83 87.5,28.83 87.95,28.83 88.08,28.7 C7.1 88.14,28.57 88.08,28.51 88.08,26.42 | J1.16 81.92,15.43 J1.15 82.36,15.56 82.36,15.75 82.23,15.88 82.23,15.94 82.36,16.07 82.36,20.64 86.23,24.51 86.23,24.96 EPD_C5.2 86.36,25.02 86.93,25.02 88.08,26.16 88.08,26.42 | 88.08,26.42 92.52,26.42 93.09,25.84 93.79,25.84 EPD_3V3.TP
EPD_3V3_C
  Top 0.3: U2.18 20.32,60.2 20.32,62.61 20.77,63.06 20.77,63.82 EPD_3V3_C.TP 20.89,63.5 21.65,63.5 22.67,62.48 33.34,62.48 42.04,53.78 47.37,53.78 69.53,31.62 70.61,31.62 R_CL1.1 70.74,31.56 77.22,31.56 77.6,31.94 78.11,31.94 78.17,32 Q3.1
EPD_BUSY  (via drill 0.3)
  Top 0.15: v83.31,18.61 85.34,16.57 85.34,15.43 J1.9 | v53.02,48.9 52.77,48.9 47.18,54.48 41.85,54.48 29.84,66.48 19.24,66.48 15.49,70.23 14.29,70.23 EPD_BUSY.TP 14.29,70.17 14.29,69.79 13.84,69.34 13.84,69.15 10.16,65.47 10.16,60.2 U2.26
  Bottom 0.15: v53.02,48.9 v83.31,18.61
EPD_CS  (via drill 0.3)
  Top 0.15: v32,40.26 22.04,40.26 20.32,41.97 20.32,42.67 U2.11 | v48.51,33.21 48.64,33.08 49.85,33.08 EPD_CS.TP 49.91,33.02 49.91,32.45 50.35,32 50.35,26.54 | v69.8,22.03 69.8,21.66 76.92,14.54 83.63,14.54 83.88,14.8 83.88,15.37 J1.12 | v55.94,24.45 55.82,24.57 55.24,24.57 55.12,24.7 R9.1 55.05,24.77 54.99,24.83 54.48,24.83 52.77,26.54 50.35,26.54 | 50.35,26.54 49.34,26.54 D6.2
  Bottom 0.15: v32,40.26 33.91,40.26 40.96,33.21 v48.51,33.21 | v69.8,22.03 58.36,22.03 v55.94,24.45
EPD_DC  (via drill 0.3)
  Top 0.15: v83.31,17.14 84.39,16.07 84.39,15.43 J1.11 | v63.06,30.8 57.66,30.8 55.24,28.38 54.61,28.38 EPD_DC.TP 54.55,28.32 54.04,28.32 v53.4,27.69 | v12.32,41.53 12.64,41.85 12.64,42.67 U2.5
  Bottom 0.15: v83.31,17.14 76.71,17.14 v63.06,30.8 | v12.32,41.53 12.13,41.53 12,41.66 11.62,41.66 11.37,41.4 11.37,41.02 25.59,26.8 52.51,26.8 v53.4,27.69
EPD_RST  (via drill 0.3)
  Top 0.15: v84.9,16.19 84.84,16.13 84.84,15.43 J1.10 | v93.15,15.11 93.28,14.99 94.49,14.99 EPD_RST.TP | v32.64,49.53 26.48,49.53 16.51,59.5 16.51,60.13 U2.21
  Bottom 0.15: v93.15,15.11 87.88,15.11 86.81,16.19 v84.9,16.19 84.84,16.19 84.39,16.64 76.58,16.64 41.72,51.5 34.54,51.5 34.29,51.24 34.29,51.18 v32.64,49.53
FLASH_CS  (via drill 0.3)
  Top 0.15: U2.12 21.59,42.67 21.59,41.97 22.86,40.7 32.77,40.7 R5.1 32.83,40.7 33.08,40.96 33.08,41.4 | 33.08,41.4 33.08,50.61 35.43,52.96 35.43,53.09 U1.1 | v34.35,40.45 D9.2 | v33.21,41.4 33.08,41.4
  Bottom 0.15: v34.35,40.45 34.16,40.45 v33.21,41.4
GDR
  Top 0.15: J1.2 88.84,15.37 88.84,14.73 88.33,14.22 76.77,14.22 67.69,23.3 67.69,23.43 Q2.1 67.63,23.43 66.99,23.43 65.91,22.35 64.01,22.35 R4.1
GND  (via drill 0.35)
  Top 0.3: U2.29_5 13.34,49.97 13.34,51.18 U2.29_6 | U2.29_2 U2.29_1 11.96,48.58 v11.96,47.05 | J4.G4 | v124.41,44.74 123.95,44.28 R2_BAT.1 | v127.95,44.74 127.95,45.98 125.95,47.99 MCP73831.2 | v46.06,31.35 46.3,31.59 D10.1 | D8.1 40.92,31.36 43.88,31.36 v43.91,31.38 | J1.MP2 76.88,12.9 71.64,12.9 71.12,13.43 71.12,17.67 v71.47,18.02 | J2.A12 J2.B1 | J4.P6 v6.49,92.6 | J1.17 v81.36,17.82 81.38,17.84 | v77.09,18.02 v74.38,18.02 | CHANGE_BUTTON.2 50.75,107.11 v50.23,106.59 | v62.59,105.36 62.59,106.03 62.23,106.4
  Bottom 0.3: v124.41,44.74 v127.95,44.74 | U2.1 v11.96,47.05 | 46.02,31.39 v46.06,31.35 46.03,31.38 v43.91,31.38 | v6.49,92.6 7.04,93.15 | v81.36,17.82 81.17,18.02 v77.09,18.02 | v74.38,18.02 v71.47,18.02 | v62.59,105.36 51.47,105.36 v50.23,106.59
  other vias: 66.39,48.73 28.82,56.34 21.34,72.8 24.52,38.27 56.25,107.31 56.25,103.06 28.68,64.08 30.02,60.38 30.05,41.73 90.53,49.07 105.38,48.66 61.83,43.99 29.59,45.22 17.1,48.59 151.9,32.48 35.07,56.48 29.64,51.52 10.97,80.47 10.08,96.75 33.25,36.87
  pour Top: 6.46,42.41 6.39,42.34 6.37,42.32 0.08,42.32 0.08,0.08 170.12,0.08 170.12,67.12 92.18,67.12 92.16,67.14 92.14,67.16 92.12,67.18 92.12,111.12 68.63,111.12 68.63,110.48 68.61,110.46 68.59,110.44 68.57,110.42 20.33,110.42 20.31,110.44 20.29,110.46 20.27,110.48 20.27,111.12 0.13,111.12 0.13,60.58 6.42,60.58 6.44,60.56 6.46,60.54 6.48,60.52 6.48,42.43
  pour Bottom: 6.46,42.41 6.39,42.34 6.37,42.32 0.08,42.32 0.08,0.08 170.12,0.08 170.12,67.12 92.18,67.12 92.16,67.14 92.14,67.16 92.12,67.18 92.12,111.12 68.63,111.12 68.63,110.48 68.61,110.46 68.59,110.44 68.57,110.42 20.33,110.42 20.31,110.44 20.29,110.46 20.27,110.48 20.27,111.12 0.13,111.12 0.13,60.58 6.42,60.58 6.44,60.56 6.46,60.54 6.48,60.52 6.48,42.43
GPIO8  (via drill 0.3)
  Top 0.15: v20.51,35.31 20.38,35.18 20.38,34.92 20.64,34.67 21.14,34.67 R1.1 | v19.49,41.53 19.05,41.97 19.05,42.67 U2.10
  Bottom 0.15: v20.51,35.31 20.51,40.51 v19.49,41.53
I2C_PW  (via drill 0.3)
  Top 0.15: 153.07,11.65 153.42,12 153.42,12.64 SENSOR2.2 | 153.07,11.65 152.65,11.24 152.65,9.84 SENSOR2.8 152.65,9.72 152.65,4.7 | 153.07,11.65 154.18,10.54 154.18,9.84 SENSOR2.6 | R2-PINH.2 157.92,4.57 157.8,4.7 154.88,4.7 C2.1 154.75,4.7 152.65,4.7 | v36.01,59.05 22.04,59.05 21.59,59.5 21.59,60.13 U2.17 | v39.56,59.05 71.18,59.05 88.58,41.66 108.22,41.66 144.99,4.89 147.89,4.89 148.08,4.7 R1_PINH.2 148.15,4.7 151.26,4.7 151.45,4.89 C1.1 151.51,4.83 151.64,4.7 152.65,4.7
  Bottom 0.15: v39.56,59.05 v36.01,59.05
INT_RTC  (via drill 0.3)
  Top 0.15: INT_RTC.TP 95.95,57.4 95,58.36 94.87,58.36 93.41,59.82 93.41,60.13 R1_PINH2.1 93.34,60.01 91.06,60.01 v90.55,59.5 | v21.91,48.2 21.27,48.2 16.51,43.43 16.51,42.74 U2.8 | v86.55,59.05 87.25,59.75 87.25,60.33 U3.3
  Bottom 0.15: v21.91,48.2 29.34,48.2 40.2,59.05 v86.55,59.05 86.61,59.05 87.12,58.55 89.6,58.55 v90.55,59.5
IO/BOOT  (via drill 0.3)
  Top 0.15: BOOT_BUTTON.3 25.72,109.54 25.15,109.54 24.13,108.52 23.88,108.52 22.86,109.54 22.29,109.54 BOOT_BUTTON.4 22.23,109.54 22.1,109.41 20.64,109.41 C6.1 20.57,109.35 20.45,109.22 16.57,109.22 7.87,100.52 7.87,98.36 5.02,95.5 4.13,95.5 3.62,95 3.62,86.93 v23.62,66.93 | v24.13,61.98 24.13,60.2 U2.15
  Bottom 0.15: v24.13,61.98 24.13,66.42 v23.62,66.93
IO/CHANGE  (via drill 0.3)
  Top 0.15: CHANGE_BUTTON.3 50.74,109.41 50.04,109.41 49.15,108.52 48.77,108.52 47.88,109.41 47.31,109.41 CHANGE_BUTTON.4 47.24,109.41 46.61,109.41 46.03,108.83 C10.1 45.56,109.27 44.7,108.46 v44.26,108.01 | v13.97,61.66 13.97,60.2 U2.23
  Bottom 0.15: v13.97,61.66 13.97,77.72 v44.26,108.01
MISO  (via drill 0.3)
  Top 0.15: MISO.TP 10.1,73.09 9.72,72.71 9.72,72.07 8.89,71.25 8.89,60.2 U2.27 8.89,60.13 8.89,59.37 v11.81,56.45 | 34.8,36.01 39.81,36.01 40.07,35.75 D12.2 | 34.8,36.01 28.57,36.01 R8.1 | v34.73,51.05 34.8,51.05 35.43,51.69 35.43,51.82 U1.2 | 34.8,36.01 v34.8,40.01
  Bottom 0.15: 34.73,42.93 34.73,40.7 34.8,40.64 v34.8,40.01 | 34.73,42.93 v34.73,51.05 | v11.81,56.45 11.81,56.26 24.51,43.56 24.51,43.18 24.77,42.93 34.73,42.93
MOSI  (via drill 0.3)
  Top 0.15: 6.76,90.2 5.97,89.41 5.14,89.41 5.08,89.34 J4.P3 | 6.76,90.2 12.7,96.14 12.7,98.55 R7.1 12.76,98.61 12.95,98.61 v13.4,99.06 | v14.16,100.08 14.16,102.23 D11.2 | v82.87,19.68 J1.14 | v71.12,35.94 70.17,36.89 MOSI.TP | v44.51,49.34 43.24,49.34 U1.5 | v31.75,49.09 20.89,49.09 15.24,43.43 15.24,42.74 U2.7 | v42.04,54.93 6.76,90.2
  Bottom 0.15: v14.16,100.08 14.16,99.82 v13.4,99.06 | v82.87,19.68 71.12,31.43 v71.12,35.94 71.06,35.94 57.66,49.34 v44.51,49.34 44.45,49.34 41.97,51.82 | v31.75,49.09 31.75,49.28 34.29,51.82 41.97,51.82 | v42.04,54.93 42.04,51.94 41.97,51.88 41.97,51.82
N$2  (via drill 0.3)
  Top 0.15: v162.13,52.13 159.4,49.4 158.89,49.4 R2-USB1.2 | v164.6,52.96 164.48,53.09 163.65,53.09 J2.A5
  Bottom 0.15: v162.13,52.13 163.78,52.13 v164.6,52.96
N$3  (via drill 0.3)
  Top 0.15: v146.24,47.5 143.64,47.5 R2-USB.1 | v164.6,55.95 164.41,56.14 163.65,56.14 J2.B5
  Bottom 0.15: v146.24,47.5 156.16,47.5 v164.6,55.95
N$4
  Top 0.15: C1_BAT1.1 115.25,36.13 115.25,36.7 117.16,38.61 117.16,38.86 117.35,39.05 IC4.3 117.09,38.86 116.46,39.5 116.46,41.15 | 116.46,41.15 116.65,41.15 116.78,41.02 117.35,41.02 IC4.1 117.41,41.02 117.98,41.02 118.68,41.72 124.97,41.72 125.03,41.66 129.6,41.66 130.37,42.42 130.94,42.42 Q1.2 | 116.46,41.15 115.32,41.15 D2.1
N$6  (via drill 0.3)
  Top 0.15: v87.44,16.19 87.38,16.13 87.38,15.43 J1.5 | v93.15,20.57 93.41,20.83 93.92,20.83 93.98,20.89 EPD_C2.2
  Bottom 0.15: v87.44,16.19 88.77,16.19 v93.15,20.57
N$7
  Top 0.15: EPD_C12.1 77.92,26.35 79.06,26.35 EPD_C11.1 79.12,26.35 80.26,26.35 EPD_C10.1 80.33,26.35 81.53,26.35 EPD_C9.1 81.6,26.35 82.74,26.35 EPD_C8.1 82.8,26.35 83.88,26.35 EPD_C7.1 83.95,26.35 85.03,26.35 EPD_C6.1 85.15,26.29 86.3,26.29 EPD_C5.1
N$8  (via drill 0.3)
  Top 0.15: v59.37,96.77 59.37,94.44 C_DELAY.1 | v58.99,98.11 58.74,98.36 58.23,98.36 58.17,98.42 IC1.5
  Bottom 0.15: v59.37,96.77 59.37,97.73 v58.99,98.11
N$9
  Top 0.15: D4.2 96.39,31.3 96.01,31.69 96.01,37.85 95.69,38.16 95.25,38.16 C4.1 95.19,38.23 95.12,38.29 94.61,38.29 91.57,41.34 86.04,41.34 D3.1
N$11
  Top 0.15: CHG_LED.C 120.33,48.7 119.89,48.7 119.57,48.39 119.57,48.2 119.38,48.01 119.13,48.01 118.75,47.62 118.75,47.24 R1_BAT.1
N$12  (via drill 0.3)
  Top 0.15: v121.47,47.18 120.14,47.18 R1_BAT.2 | v124.08,47.31 124.33,47.05 125.03,47.05 MCP73831.1
  Bottom 0.15: v121.47,47.18 123.95,47.18 v124.08,47.31
N$13
  Top 0.15: J1.24 77.85,24.96 EPD_C12.2
N$14
  Top 0.15: MCP73831.5 122.46,44.94 R2_BAT.2
N$15
  Top 0.15: R_CAPACITOR.1 86.93,63.37 86.93,63.82 88.01,64.9 88.58,64.9 88.84,65.15 D7.1
N$16
  Top 0.15: J1.22 78.87,23.24 80.33,24.7 80.33,24.96 EPD_C10.2
N$18
  Top 0.15: J1.20 79.88,15.43 79.88,21.84 82.74,24.7 82.74,24.96 EPD_C8.2
N$19
  Top 0.15: J1.19 80.39,15.43 80.39,21.14 83.95,24.7 83.95,24.96 EPD_C7.2
N$20
  Top 0.15: J1.18 80.83,15.43 80.83,15.81 80.9,15.88 80.9,16.07 80.83,16.13 80.83,20.45 85.09,24.7 85.09,24.96 EPD_C6.2
N$31
  Top 0.15: J1.8 85.85,16.13 88.33,18.61 89.85,18.61 93.41,22.16 93.92,22.16 93.98,22.23 EPD_C2.1 94.04,22.29 94.42,22.29 94.74,21.97 97.03,21.97 EPD_C1.1
N$32  (via drill 0.3)
  Top 0.15: v87.95,16.64 87.88,16.57 87.88,15.43 J1.4 | v92.08,20.13 96.01,20.13 96.39,20.51 96.9,20.51 97.03,20.64 EPD_C1.2
  Bottom 0.15: v87.95,16.64 88.58,16.64 v92.08,20.13
PREVGH  (via drill 0.3)
  Top 0.3: 81.34,24.38 79.38,22.42 79.38,15.43 J1.21 | 81.34,24.38 81.34,24.77 81.53,24.96 EPD_C9.2 | v87.19,29.91 89.34,32.07 89.66,32.07 D5.1 | v81.53,24.26 81.47,24.32 81.34,24.38
  Bottom 0.3: v81.53,24.26 v87.19,29.91
PREVGL  (via drill 0.3)
  Top 0.3: 78.83,24.35 78.99,24.51 78.99,24.89 79.06,24.96 EPD_C11.2 | 78.83,24.35 78.36,23.88 78.36,16.07 78.3,16 78.3,15.81 78.36,15.75 J1.23 | v82.55,38.42 82.55,41.27 D3.2 | v78.93,24.26 78.83,24.35
  Bottom 0.3: v82.55,38.42 82.55,27.88 v78.93,24.26
RESE  (via drill 0.3)
  Top 0.15: 88.39,16.19 88.39,17.91 v88.33,17.97 | 88.39,16.19 88.39,15.43 J1.3 | v87.69,18.61 87.69,19.11 87.88,19.3 R3.1 | 88.39,16.19 89.66,16.19 89.85,16 89.85,14.86 88.9,13.91 76.47,13.91 68.22,22.16 67.69,22.16 Q2.2
  Bottom 0.15: v87.69,18.61 v88.33,17.97
RESE'
  Top 0.15: R2.2 65.85,14.35 63.37,14.35 62.8,13.78 62.17,13.78 SJ1.2
RESET  (via drill 0.3)
  Top 0.15: C5.1 67.19,109.41 65.85,109.41 RESET_BUTTON.3 65.79,109.41 65.02,109.41 64.14,108.52 63.82,108.52 62.93,109.41 62.36,109.41 RESET_BUTTON.4 62.29,109.41 62.3,109.4 R_RESET.1 60.84,109.4 61.39,108.85 61.39,107.43 60.74,106.78 61.34,105.41 55.37,99.44 55.37,98.49 IC1.1 55.31,98.42 v54.48,98.42 | v15.11,59.05 10.16,54.1 10.16,42.74 U2.3
  Bottom 0.15: v54.48,98.42 v15.11,59.05
RTC_RST  (via drill 0.3)
  Top 0.15: v23.69,61.34 23.3,61.34 22.86,60.9 22.86,60.2 U2.16 | v85.41,61.53 85.98,60.96 85.98,60.39 U3.4
  Bottom 0.15: v23.69,61.34 85.22,61.34 v85.41,61.53
RX
  Top 0.15: U2.24 12.7,60.2 12.7,61.02 16.07,64.39 16.07,65.6 RX.TP
SCK  (via drill 0.3)
  Top 0.15: v13.97,41.21 13.97,42.67 U2.6 | v13.46,40.2 13.4,40.2 SCK.TP | v6.16,91.5 5.08,91.5 J4.P5 | 45.21,42.82 45.21,26.99 45.58,26.62 D10.2 46.23,26.86 46.23,22.54 46.48,22.29 R6.1 46.48,22.16 46.61,22.04 47.18,22.04 v47.31,21.91 | 45.21,42.82 45.21,49.28 43.94,50.55 43.24,50.55 U1.6 | v83.31,16.19 83.38,16.13 83.38,15.43 J1.13 | 45.21,42.82 44.61,43.42 v34.29,42.48
  Bottom 0.15: v13.46,40.2 13.97,40.7 v13.97,41.21 13.97,42.48 | v6.16,91.5 6.16,61.47 13.97,53.66 13.97,42.48 | v83.31,16.19 53.02,16.19 v47.31,21.91 | v34.29,42.48 13.97,42.48
SCL  (via drill 0.3)
  Top 0.15: 155.48,11.53 155,12 155,12.64 SENSOR2.4 | 155.48,11.53 157.99,9.02 157.99,5.84 R2-PINH.1 | v139.95,45.34 139.95,46.61 137.22,49.34 136.59,49.34 U4.7 | v163.83,21.46 164.47,20.83 J3.4 | v155.51,11.56 155.48,11.53 | v36.7,53.98 23.3,53.98 17.78,59.5 17.78,60.13 U2.20 | v89.22,52.2 89.79,51.63 89.79,51.05 U3.16
  Bottom 0.15: v155.51,11.56 163.83,19.88 v163.83,21.46 v139.95,45.34 96.14,45.34 89.28,52.2 v89.22,52.2 85.72,55.69 41.27,55.69 39.56,53.98 v36.7,53.98
SDA  (via drill 0.3)
  Top 0.15: 153.86,13.72 152.21,13.72 148.15,9.65 148.15,6.03 R1_PINH.1 | 153.86,13.72 154.24,13.34 154.24,12.7 SENSOR2.3 | v140.4,44.26 140.4,46.67 137.16,49.91 137.03,49.91 136.97,49.85 136.59,49.85 U4.8 | v163.39,20.13 163.64,19.88 164.4,19.88 164.47,19.81 J3.3 | v153.92,13.72 153.86,13.72 | v40.64,54.42 24.13,54.42 19.05,59.5 19.05,60.13 U2.19 | v87.95,52.2 88.52,51.63 88.52,51.05 U3.15
  Bottom 0.15: v163.39,20.13 161.86,21.65 | 161.86,21.65 140.4,43.12 v140.4,44.26 96.2,44.26 88.27,52.2 v87.95,52.2 84.77,55.37 41.85,55.37 40.89,54.42 v40.64,54.42 | 161.86,21.65 v153.92,13.72
SRC  (via drill 0.3)
  Top 0.15: C4.2 95.19,36.89 91.19,36.89 89.92,35.62 89.72,35.62 D5.2 89.66,35.62 86.17,35.62 84.33,37.47 82.8,37.47 L1.1 82.74,37.47 80.89,37.47 v79.48,36.05 | v73.91,29.78 69.79,25.65 69.79,22.86 Q2.3
  Bottom 0.15: v79.48,36.05 73.91,30.49 v73.91,29.78
SS_SD  (via drill 0.3)
  Top 0.15: R10.1 43.56,22.1 43.56,26.48 41.55,28.49 D8.2 42.42,27.26 v42.42,27.24 | v11.81,41.21 11.43,41.59 11.43,42.67 U2.4 11.37,42.74 11.18,42.93 11.18,51.75 12.7,53.28 v12.7,56.01 | v12.7,78.49 12.7,81.03 6.1,87.63 6.1,87.82 5.78,88.14 5.46,88.14 J4.P2
  Bottom 0.15: v11.81,41.21 25.78,27.24 v42.42,27.24 | v12.7,56.01 v12.7,78.49
TX
  Top 0.15: U2.25 11.43,60.2 11.43,64.2 13.78,66.55 TX.TP
USB_D+  (via drill 0.3)
  Top 0.15: v135.06,51.5 142.88,51.5 146.75,47.62 147.32,47.62 D1.1 | v24.96,43.37 24.32,42.74 24.13,42.74 U2.14
  Bottom 0.15: v135.06,51.5 91,51.5 86.17,56.33 37.91,56.33 v24.96,43.37
USB_D-  (via drill 0.3)
  Top 0.15: v144.53,45.72 147.32,45.72 D1.3 | v26.04,43.81 23.24,43.81 22.8,43.37 22.8,42.74 U2.13
  Bottom 0.15: v144.53,45.72 140.21,45.72 134.75,51.18 90.87,51.18 86.04,56.01 38.04,56.01 26.04,44.01 v26.04,43.81
VBAT
  Top 0.3: U4.2 134.62,49.34 134.62,48.9 U4.3 134.43,48.9 134.24,49.09 134.05,49.09 133.92,49.21 130.18,45.47 | 130.18,45.47 130.18,44.7 130.05,44.58 Q1.3 | VBAT.TP 127.51,57.34 127.51,56.83 128.59,55.75 128.59,53.15 C2_BAT.1 128.46,53.02 127.83,53.02 125.09,50.29 125.09,48.96 MCP73831.3 125.22,48.9 125.92,48.9 129.29,45.53 130.05,45.53 130.18,45.47
VBUS
  Top 0.3: 114.43,39.37 112.78,39.37 R1_PWRUSB.2 | 114.43,39.37 114.68,39.12 115.19,39.12 115.25,39.05 D2.2 | 114.43,39.37 114.43,47.18 115.06,47.82 115.06,48.32 C1_BAT.1 115.25,48.58 115.63,48.58 115.82,48.77 118.81,48.77 CHG_LED.A 118.87,48.9 118.87,49.28 119.19,49.59 120.97,49.59 121.6,48.96 122.36,48.96 MCP73831.4 122.49,48.9 122.62,48.77 122.62,48.58 123.51,47.69 123.51,47.12 128.14,42.48 129.03,42.48 Q1.1 129.16,42.55 129.29,42.67 129.73,42.67 130.81,43.75 150.05,43.75 150.21,43.59 | 151.96,45.34 150.21,43.59 | 150.21,43.59 150.11,43.5 150.11,42.93 C5_USB.1 | 151.96,45.34 152.53,45.34 152.65,45.47 C4_USB.1 152.78,45.59 152.78,46.29 152.18,47.23 VBUS.TP | D1.5 149.86,46.61 150.75,46.61 151.89,45.47 151.96,45.34
VRTC
  Top 0.3: R_CAPACITOR.2 88.2,63.31 88.2,61.85 87.95,61.59 87.95,59.31 88.01,59.24 88.01,59.18 87.31,58.48 87.31,51.18 U3.14 87.31,50.99 87.31,50.61 88.2,49.72 88.33,49.72 88.39,49.66 88.52,49.66 88.9,49.28 88.9,48.83 C8.1 89.03,48.64 89.47,48.64 90.11,48.01 94.11,48.01 94.61,48.51 94.61,52.2 97.16,54.74 97.66,54.74 C10_SUPERCAP.2
VUSB
  Top 0.3: J2.A4 163.65,51.82 163.65,52.07 J2.B9 163.52,52.01 162.83,52.01 | J2.B4 163.65,56.64 163.65,56.9 J2.A9 163.52,56.77 162.89,56.77 162.63,56.52 162.63,52.2 162.83,52.01 | PFMF.050.1.1 152.84,39.3 162.24,48.7 162.24,51.49 162.7,51.94 162.83,52.01